# Altium PCB spa_psu.PcbDoc
Units mil, origin at the board's own origin, x right, y up, seen from the top; angles counter-clockwise.
Board outline 6900 x 2400 mil, 2 copper layers (Top Layer, Bottom Layer); 29 components, 21 nets, 93 pads, 0 vias.
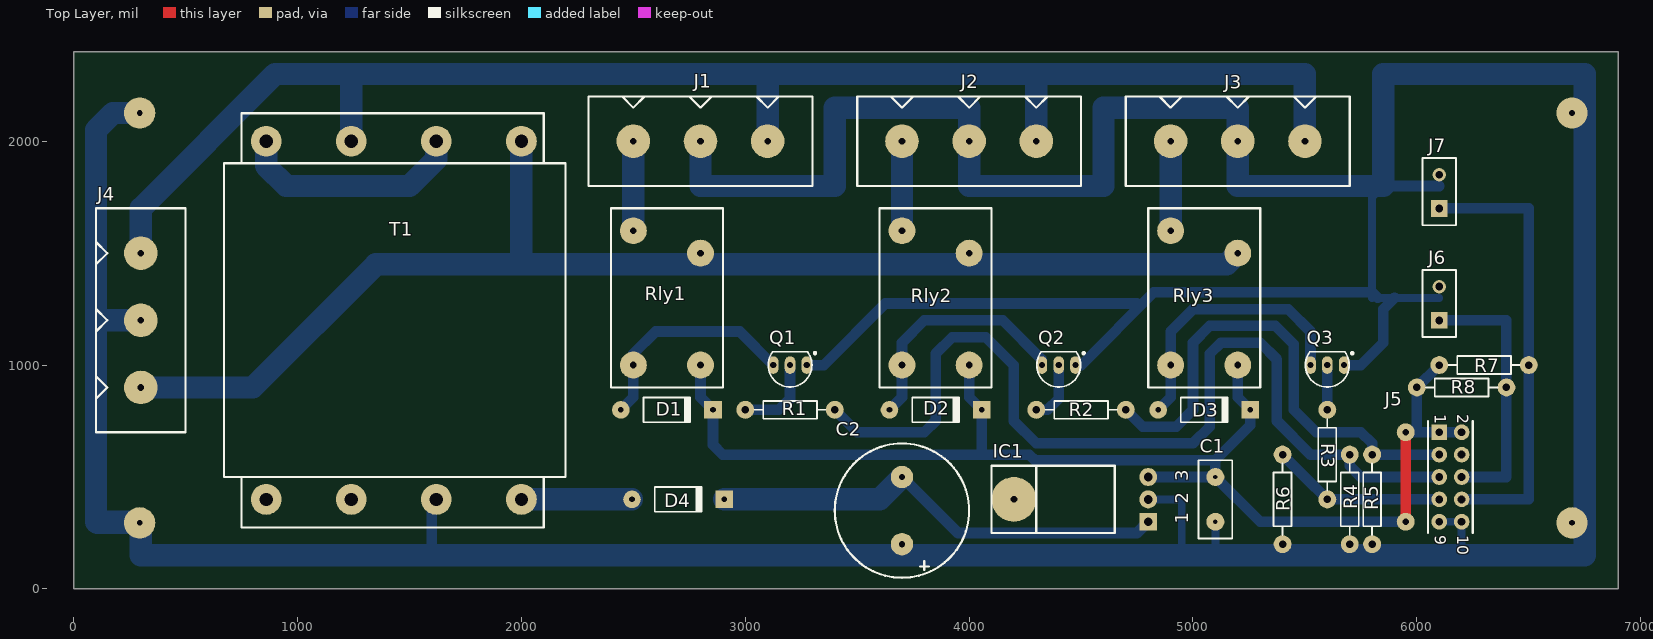
[diagram p0: Top Layer view]
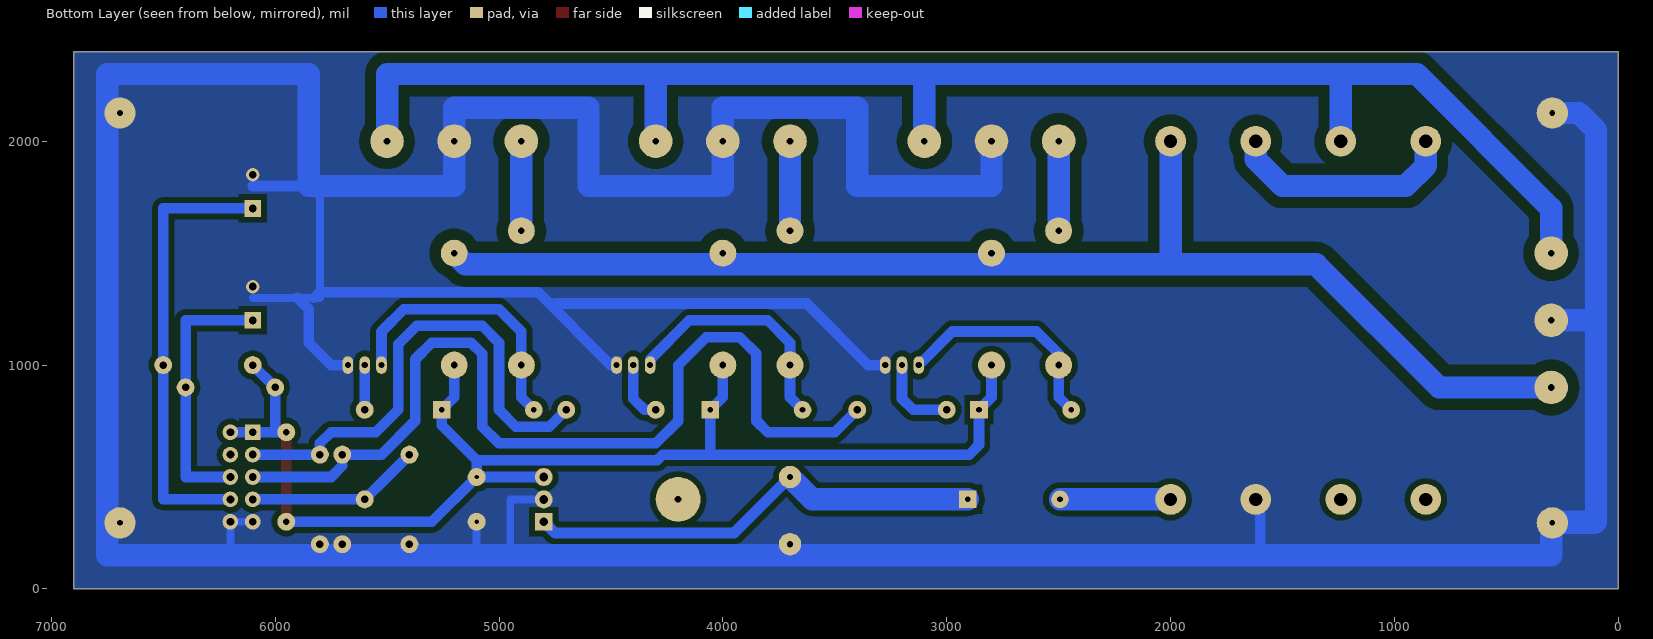
[diagram p1: Bottom Layer view, seen from below]

## Layer stack, top to bottom
Top Layer: signal copper 1.4
Dielectric: dielectric 12.6, FR-4, Dk 4.8
Bottom Layer: signal copper 1.4

## Board outline
0,0 6900,0 6900,2400 0,2400

## Design rules (kind name [scope] priority, off if disabled: settings)
Clearance "Neutral Clearance" [InPolygon vs InNet('NEUTRAL')] p1: gap=50
Clearance "Neutral Clearance_1" [InPolygon vs InNet('NetT1_2')] p2: gap=50
Clearance "Neutral Clearance_2" [InPolygon vs InNet('NetJ1_1')] p3: gap=50
Clearance "Neutral Clearance_3" [InPolygon vs InNet('NetJ2_1')] p4: gap=50
Clearance "Neutral Clearance_4" [InPolygon vs InNet('NetJ3_1')] p5: gap=50
Clearance "Active Clearance" [InPolygon vs InNet('ACTIVE')] p6: gap=50
Clearance "Polygon Clearence" [InPolygon] p7: gap=25
PolygonConnect [All] p1: connectstyle=Direct reliefconductorwidth=10 reliefentries=4 polygonreliefangle="90 Angle"
RoutingVias [All] p1: holewidth=28 width=50 viastyle="Through Hole" minholewidth=28 minwidth=50 maxholewidth=28 maxwidth=50
SilkscreenOverComponentPads [All] p1: minsilkscreentomaskgap=10
SolderMaskExpansion [All] p1: expansion=4
Width [All] p1: maxlimit=200 minlimit=10 preferedwidth=40
27 further rules are at their usual default settings.

## Components (designator, comment, footprint, x,y, rotation, side; value= is the part's Value field where it differs from the comment)
C1 "10uF 25V" RAD-0.2 5100,400 r270 top
C2 "4700uF 25V" cap_radial_600 3700,500 r270 top
D1 "1N4007" DO-41 2650,800 r0 top
D2 "1N4007" DO-41 3850,800 r0 top
D3 "1N4007" DO-41 5050,800 r0 top
D4 "1N4007" DO-41 2700,400 r0 top
IC1 "7805" TO-220-AB 4800,400 r90 top
J1 "Screw Terminal" Screw_Terminal_3way 2500,2000 r0 top
J2 "Screw Terminal" Screw_Terminal_3way 3700,2000 r0 top
J3 "Screw Terminal" Screw_Terminal_3way 4900,2000 r0 top
J4 "Screw Terminal" Screw_Terminal_3way 300,900 r90 top
J5 "Header 5X2H" HDR2X5H 6100,700 r270 top
J6 "Header 2" HDR1X2_WIDE 6100,1200 r90 top
J7 "Header 2" HDR1X2_WIDE 6100,1700 r90 top
Q1 "2N3904" TO-92A 3200,1000 r90 top
Q2 "2N3904" TO-92A 4400,1000 r90 top
Q3 "2N3904" TO-92A 5600,1000 r90 top
R1 "4k7" AXIAL-0.4 3200,800 r180 top
R2 "4k7" AXIAL-0.4 4500,800 r180 top
R3 "4k7" AXIAL-0.4 5600,600 r90 top
R4 "4k7" AXIAL-0.4 5700,400 r90 top
R5 "4k7" AXIAL-0.4 5800,400 r90 top
R6 "4k7" AXIAL-0.4 5400,400 r90 top
R7 "4k7" AXIAL-0.4 6300,1000 r180 top
R8 "4k7" AXIAL-0.4 6200,900 r180 top
Rly1 "Relay-SPST" RELAY_8A 2500,1000 r90 top
Rly2 "Relay-SPST" RELAY_8A 3700,1000 r90 top
Rly3 "Relay-SPST" RELAY_8A 4900,1000 r90 top
T1 "Hammond 229E24" 229E24 2000,2000 r180 top

## Footprints (in the part's own frame and the unit in brackets; to place one, negate y for a bottom-side part, rotate by r counter-clockwise, add the part's x,y. Pads: shape width x height; smd on the part's side, far side on the other; paste and mask are expansions set on the pad)
229E24 [mm] "Hammond 2VA transformer"
  round 3.5 hole 1.5: 1(0,0) 2(9.652,0) 3(28.956,0) 4(19.304,0) 5(0,40.64) 6(9.652,40.64) 7(28.956,40.64) 8(19.304,40.64)
  silkscreen extent -5,-3.18 33.75,43.82
AXIAL-0.4 [mil] "Axial Device, Thru-Hole; 2 Leads; 0.4 in Pin Spacing"
  round 80 hole 33.46: 1(-200,0) 2(200,0)
  silkscreen extent -160,-40 160,40
cap_radial_600 [mil]
  round 100 hole 28: 1(0,0) 2(300,0)
  silkscreen extent -150,-300 450,300
DO-41 [mm] "Diode, Axial; Body 5.2 x 2.7 mm (LxDia. max), Lead Dia. 0.86 mm (max)"
  round 2 hole 0.635: 1(-5.23,0)
  rect 2x2 hole 0.635: 2(5.23,0)
  silkscreen extent -2.65,-1.4 2.75,1.4
HDR1X2_WIDE [mm] "Connector; Header; 2 Position"
  rect 1.905x1.905 hole 0.9: 1(0,0)
  round 1.5 hole 0.9: 2(3.81,0)
  silkscreen extent -1.91,-1.91 5.71,1.91
HDR2X5H [mil] "Connector; Header; 5x2 Position; Right Angle"
  rect 70x70 hole 35.43: 1(0,0)
  round 70 hole 35.43: 2(0,100) 3(100,0) 4(100,100) 5(200,0) 6(200,100) 7(300,0) 8(300,100) 9(400,0) 10(400,100)
  silkscreen extent -50,-50 450,150
RAD-0.2 [mil] "Radial Cap, Thru-Hole; 2 Leads; 0.2 in Pin Spacing"
  round 80 hole 20: 1(-100,0) 2(100,0)
  silkscreen extent -175,-75 175,75
RELAY_8A [mil]
  round 120 hole 30: 1(500,-300) 2(600,0) 3(0,-300) 4(0,0)
  silkscreen extent -100,-400 700,100
Screw_Terminal_3way [mil]
  round 150 hole 30: 1(0,0) 2(300,0) 3(600,0)
  silkscreen extent -200,-200 800,200
TO-92A [mm] "TO, Flat Index; 3 In-Line, Axial Leads; Body Dia. 4.5mm; Leads 0.51 x 0.48 mm (max)"
  oval 2x1.2 hole 0.7: 1(0,-1.905) 2(0,0) 3(0,1.905)
  silkscreen extent -2.48,-2.96 1.5,2.48, body extent -2.5,-2.5 1.5,2.5, height 6.86
TO-220-AB [mil] "TO, Thru-Hole, Vertical, Heatsink Mounted; 3 In-Line Leads; Pitch 2.54 mm"
  rect 80x80 hole 39.37: 1(-100,0)
  round 80 hole 39.37: 2(0,0) 3(100,0)
  round 200 hole 30: 7(0,600)
  silkscreen extent -150,150 150,700

## Part data
C1 C2: library part ELECTRO2, "Electrolytic Capacitor"
D1 D2 D3 D4: library part "Diode 1N4007", "1 Amp General Purpose Rectifier"
IC1: library part "Volt Reg", "Voltage Regulator"
J1 J2 J3 J4: library part "Header 3", "Header, 3-Pin"
J5: "Header, 5-Pin, Dual row, Right Angle"
J6 J7: "Header, 2-Pin"
Q1 Q2 Q3: "NPN General Purpose Amplifier"
R1 R2 R3 R4 R5 R6 R7 R8: library part Res2, "Resistor"
Rly1 Rly2 Rly3: "Single-Pole Single-Throw Relay"
T1: library part "Trans BB", "Buck-boost Transformer (Ideal)"

## Free pads (board coordinates)
  round 140 hole 25: 6(295,295) 6(295,2126) 6(6693,295) 6(6693,2126)
  round 80 hole 30: 8(5950,300) 9(5950,700)

## Nets (pads, with @x,y where several pads share a name; then routed paths per layer and width w, separated by ;. In a path a pad name is that pad's centre, name@x,y a point inside that pad or via, vN(x,y) a via of type N, cw(c..) or ccw(c..) an arc to the next point about the centre after c; other vN are vias at no path point)
ACTIVE: J4.1 Rly1.1 Rly2.1 Rly3.1 T1.1 | length 5748.5
  Bottom Layer w100: J4.1 800,900 1350,1450 2000,1450 ; T1.1 2000,1450 ; Rly2.1 Rly2.1@4000,1450 ; Rly3.1 5150,1450 Rly2.1@4000,1450 ; 2000,1450 Rly2.1@4000,1450
CTRL1: J5.5 R1.1 R4.2 | length 4252.1
  Bottom Layer w47.24: R1.1 3500,700 3800,700 3850,750 3850,1050 3925,1125 4075,1125 4200,1000 4200,750 4300,650 5000,650 5075,725 5075,1050 5125,1100 5300,1100 5375,1025 5375,750 5525,600 R4.2 5700,550 5750,500 J5.5
CTRL2: J5.3 R2.1 R5.2 | length 2232.2
  Bottom Layer w47.24: R2.1 4775,725 4925,725 5000,800 5000,1100 5075,1175 5367.76,1175 5450,1092.76 5450,800 5550,700 5750,700 5800,650 R5.2 J5.3
CTRL3: J5.7 R3.1 R6.2 | length 782.8
  Bottom Layer w47.24: R6.2 5500,500 R3.1 J5.7
GND: C1.2 C2.2 IC1.2 J1.2 J2.2 J3.2 J4.2 J5.9 J5.10 J6.2 J7.2 pad.6 Q1.1 Q2.1 Q3.1 R4.1 R5.1 R6.1 T1.6 | length 23024
  Bottom Layer w35: IC1.2 4950,400 4950,150 ; 5100,150 C1.2 ; 5800,1300 5800,1750 5850,1800 ; 5825,1300 5900,1300 6100,1300 ; J5.9 J5.10 6200,150
  Bottom Layer w47.24: 1600,150 1600,380 T1.6 ; Q1.1 3350,1000 3625,1275 4750,1275 ; 4500,1000 4825,1325 5800,1325 5825,1300 ; 5350,150 5400,150 ; Q3.1 5750,1000 5850,1100 5850,1250 5900,1300 ; 5850,1800 6100,1800
  Bottom Layer w100: pad.6@295.28,295.28 104.72,295.28 100,300 ; pad.6@295.28,2125.98 175.98,2125.98 100,2050 100,1200 ; J4.2 100,1200 ; J1.2 2800,1800 3400,1800 3400,2150 4000,2150 J2.2 4000,1800 4600,1800 4600,2150 5200,2150 J3.2 5200,1800 5850,1800 5850,2300 6750,2300 6750,150 6200,150 5400,150 5100,150 4950,150 1600,150 300,150 300,300 100,300 ; 100,300 100,1200
NetC2_1: C2.1 D4.2 IC1.1 | length 2059.8
  Bottom Layer w50: C2.1 3950,250 4750,250 IC1.1
  Bottom Layer w100: D4.2 3600,400 C2.1
NetD1_1: D1.1 Q1.3 Rly1.4 | length 1001.7
  Bottom Layer w47.24: D1.1 2500,855.91 Rly1.4 2500,1050 2600,1150 2975,1150 Q1.3
NetD2_1: D2.1 Q2.3 Rly2.4 | length 1087.1
  Bottom Layer w47.24: D2.1 3700,855.91 Rly2.4 3700,1100 3800,1200 4150,1200 4325,1025 Q2.3
NetD3_1: D3.1 Q3.3 Rly3.4 | length 1231
  Bottom Layer w47.24: D3.1 4900,855.91 Rly3.4 4900,1150 5000,1250 5425,1250 5525,1150 Q3.3
NetD4_1: D4.1 T1.5 | length 494.1
  Bottom Layer w100: T1.5 D4.1
NetJ1_1: J1.1 Rly1.2 | length 400
  Bottom Layer w100: Rly1.2 J1.1
NetJ2_1: J2.1 Rly2.2 | length 400
  Bottom Layer w100: Rly2.2 J2.1
NetJ3_1: J3.1 Rly3.2 | length 400
  Bottom Layer w100: Rly3.2 J3.1
NetJ5_6: J5.6 J6.1 R8.1 | length 1200
  Bottom Layer w47.24: J6.1 6400,1200 6400,500 J5.6
NetJ5_8: J5.8 J7.1 R7.1 | length 2000
  Bottom Layer w47.24: J7.1 6500,1700 6500,400 J5.8
NetQ1_2: Q1.2 R1.2 | length 370.7
  Bottom Layer w47.24: R1.2 3150,800 3200,850 Q1.2
NetQ2_2: Q2.2 R2.2 | length 270.7
  Bottom Layer w47.24: R2.2 4350,800 4400,850 Q2.2
NetQ3_2: Q3.2 R3.2 | length 200
  Bottom Layer w47.24: R3.2 Q3.2
NetT1_2: T1.2 T1.3 | length 1037
  Bottom Layer w100: T1.3 860,1890 950,1800 1500,1800 1620,1920 T1.2
NEUTRAL: J1.3 J2.3 J3.3 J4.3 T1.4 | length 6852.7
  Bottom Layer w100: J4.3 300,1700 900,2300 1250,2300 ; T1.4 1240,2290 1250,2300 ; J1.3 3100,2300 ; J2.3 4300,2300 ; J3.3 5500,2300 4300,2300 ; 1250,2300 3100,2300 ; 3100,2300 4300,2300
V5: C1.1 D1.2 D2.2 D3.2 IC1.3 J5.1 J5.2 pad.8 pad.9 R7.2 R8.2 Rly1.3 Rly2.3 Rly3.3 | length 5846.7
  Top Layer w47.24: pad.8 pad.9
  Bottom Layer w47.24: Rly1.3 2800,855.91 D1.2 2855.91,644.09 2900,600 4050,600 ; Rly2.3 4000,855.91 D2.2 4055.91,605.91 4050,600 ; IC1.3 C1.1 ; 5112.5,587.5 5255.91,730.91 D3.2 5200,855.91 Rly3.3 ; pad.8 5300,300 C1.1 ; pad.9@5975,700 6000,700 ; R7.2 R8.2 6000,700 ; J5.2 J5.1 6000,700 ; 4050,600 4269.04,600 4294.04,575 5100,575 C1.1
pads on no net: IC1.7 J5.4 T1.7 T1.8

## Polygon pours and split planes (outlines as drawn)
GND on Bottom Layer "Top Layer-No Net" (solid, remove dead copper, pour order 4): 0,2400 6900,2400 6900,0 0,0

## Text inside footprints (layer, text, board x,y; h text height)
IC1: Top Overlay "3" at 4978.15,480.32 h59.06 r90; Top Overlay "2" at 4978.15,380.32 h59.06 r90; Top Overlay "1" at 4978.15,290.16 h59.06 r90
J5: Top Overlay "2" at 6180,780 h50 r270; Top Overlay "1" at 6080,780 h50 r270; Top Overlay "9" at 6080,240 h50 r270; Top Overlay "10" at 6180,240 h50 r270